# Altium PCB FM349ReaderV02.PcbDoc
Units mil, origin at the board's own origin, x right, y up, seen from the top; angles counter-clockwise.
Board outline 3875 x 3028 mil, 2 copper layers (Top Layer, Bottom Layer); 92 components, 80 nets, 380 pads, 77 vias.
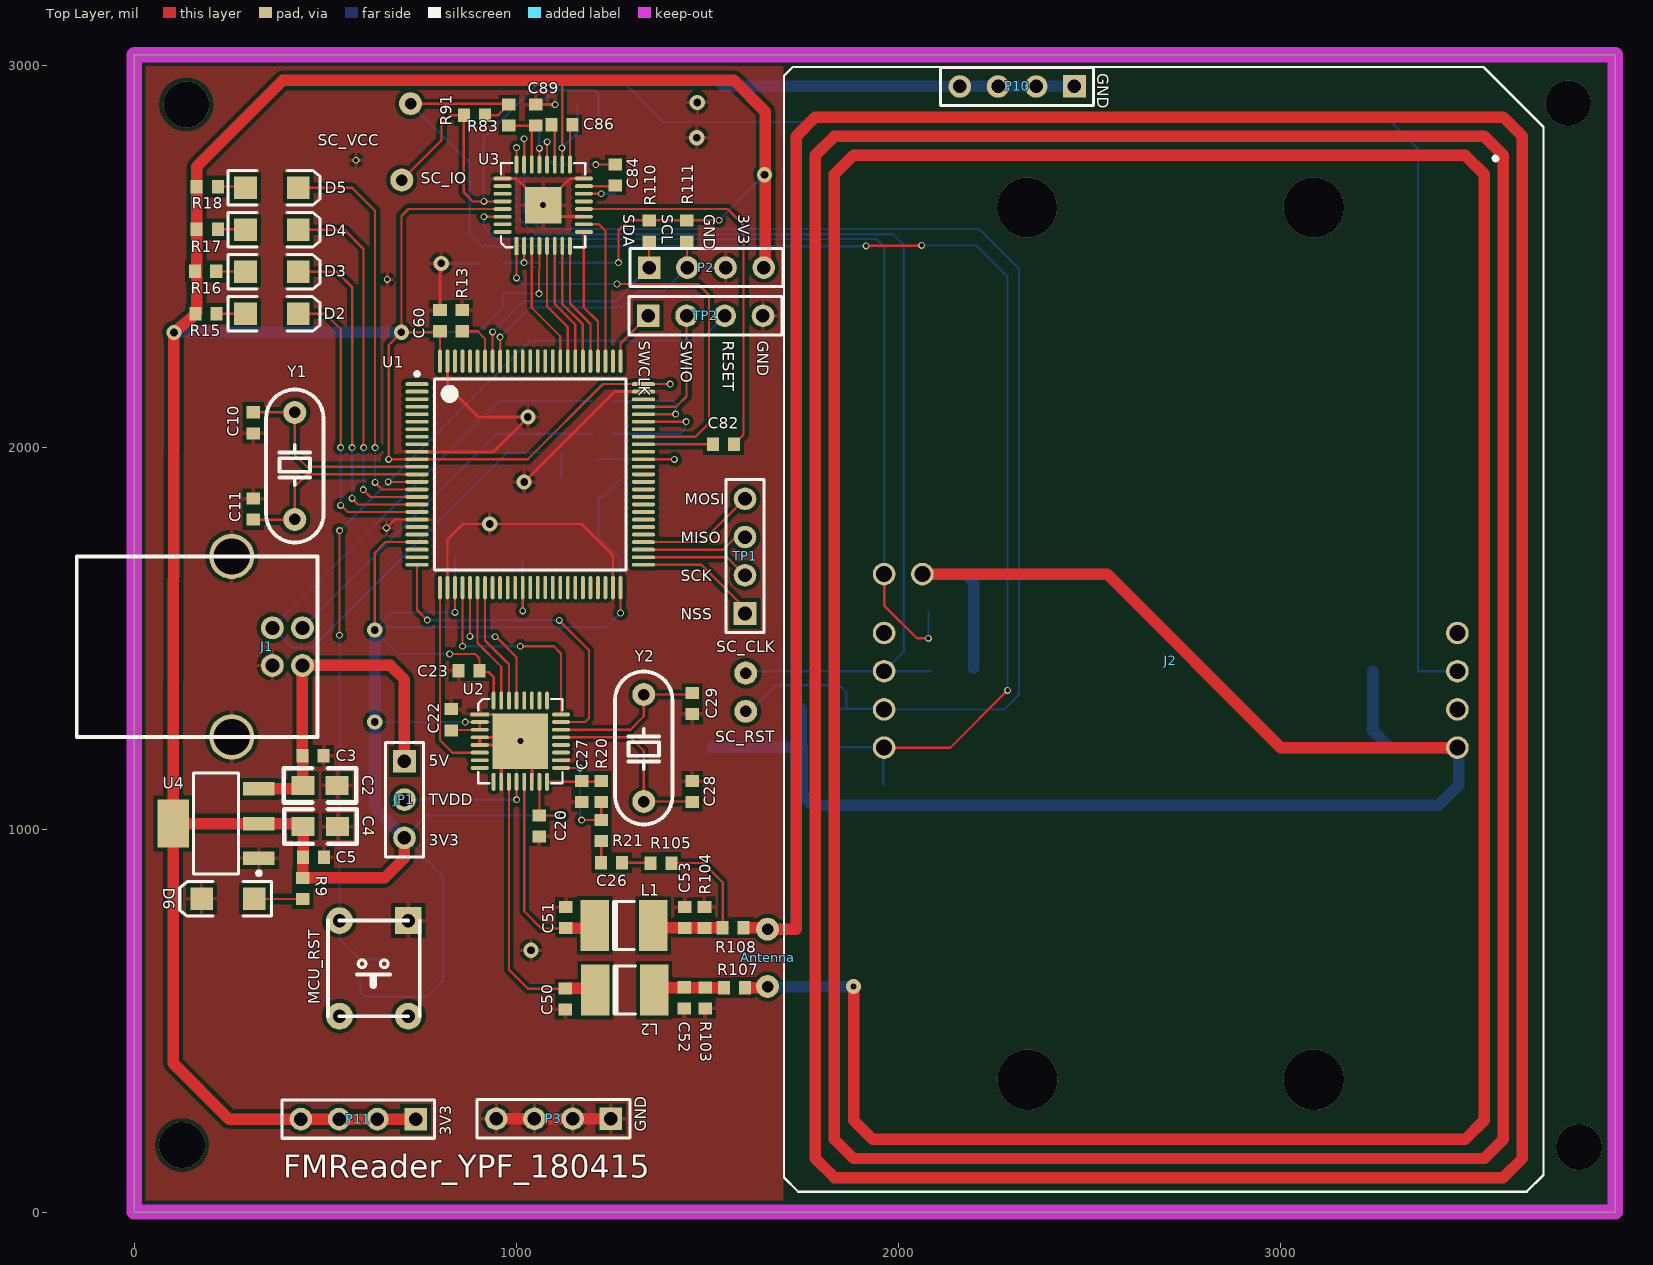
[diagram p0: Top Layer view]
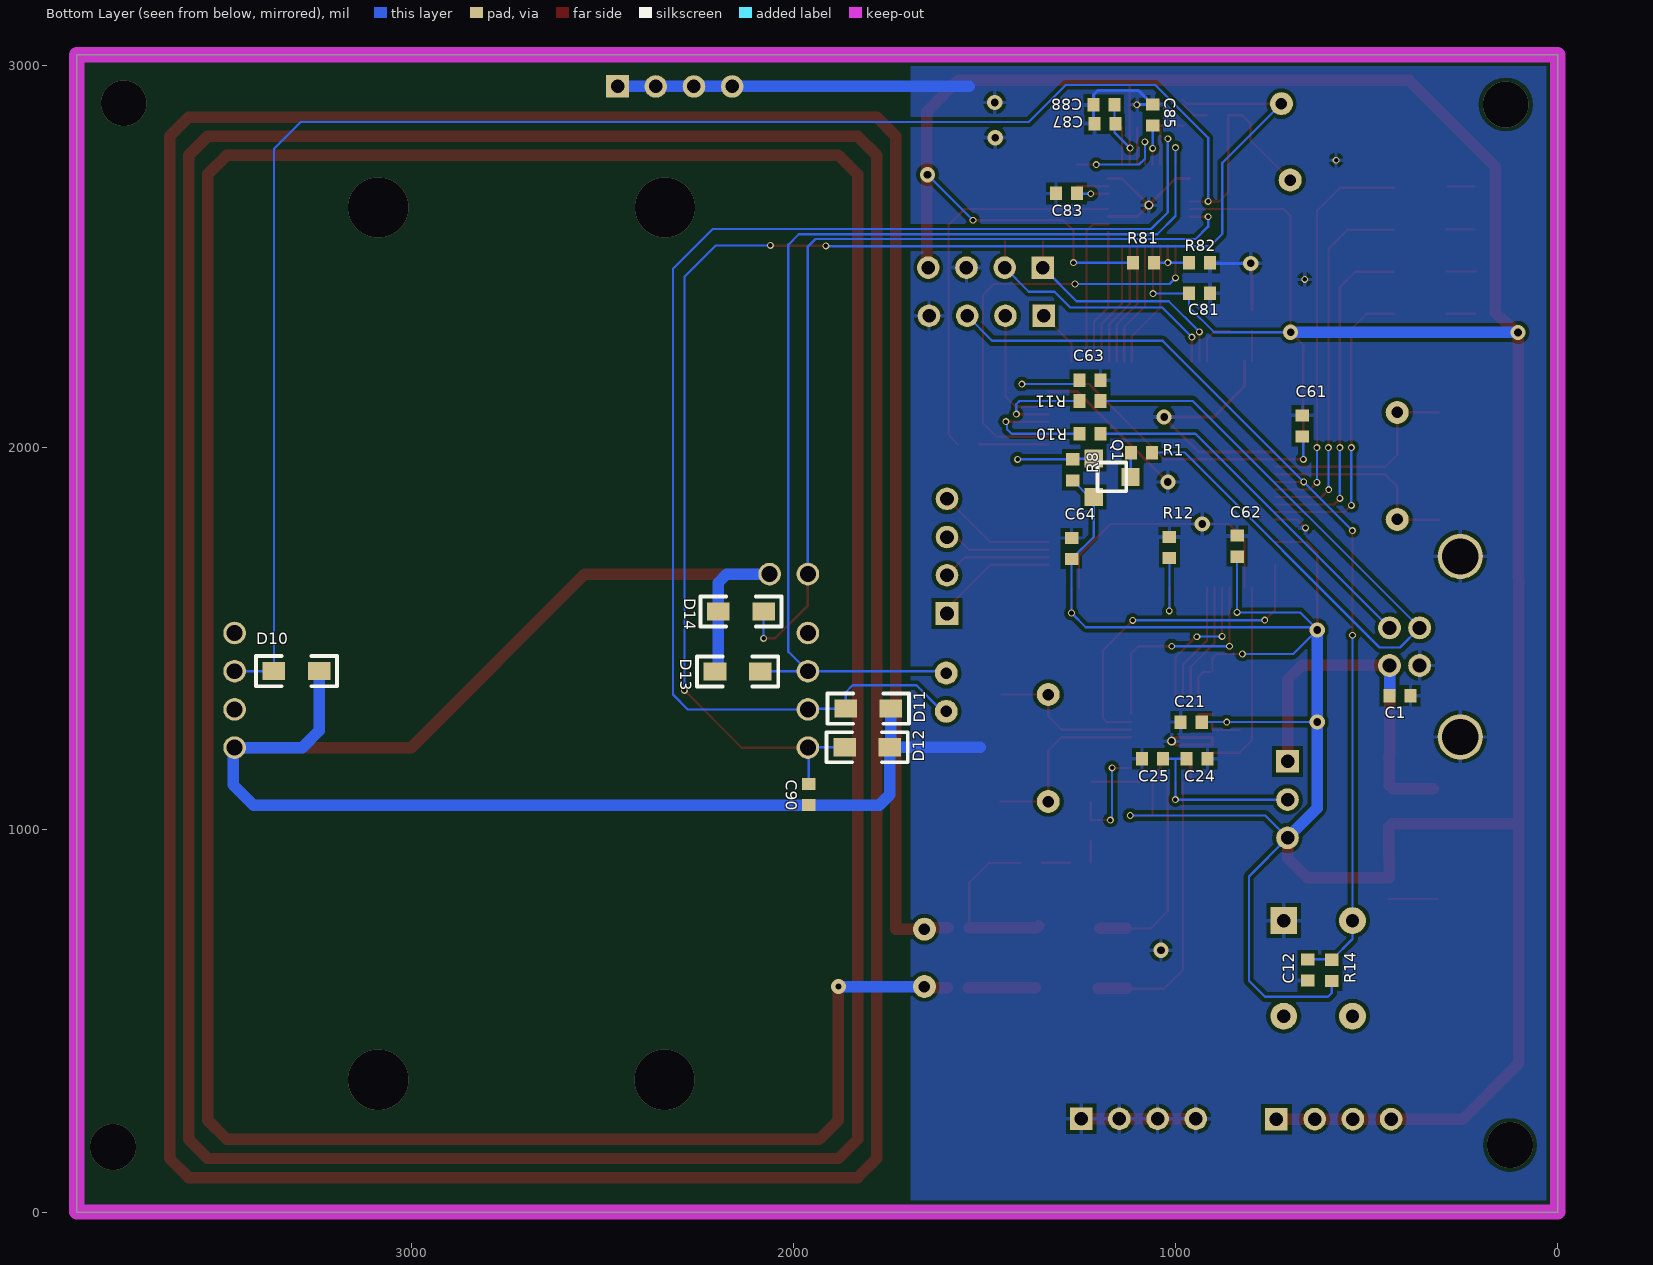
[diagram p1: Bottom Layer view, seen from below]

## Layer stack, top to bottom
Top Layer: signal copper 1.4
Dielectric: dielectric 12.6, FR-4, Dk 4.8
Bottom Layer: signal copper 1.4

## Board outline
0,0 0,3028 3875,3028 3875,0 0,0

## Design rules (kind name [scope] priority, off if disabled: settings)
Clearance Clearance_1 [All vs InPolygon] p1: gap=10
Clearance [All] p2: gap=6
ComponentClearance [All] p1 off: gap=10 collisioncheckmode=3 verticalgap=10 showdistances=FALSE
HoleSize [All] p1: absolutevalues=TRUE maxlimit=68501.97 minlimit=1 maxpercent=80.000 minpercent=20.000
MinimumSolderMaskSliver [All] p1 off: minsoldermaskwidth=10
PolygonConnect [All] p1: connectstyle=Relief reliefconductorwidth=10 reliefentries=4 polygonreliefangle="90 Angle"
RoutingVias [All] p1: holewidth=28 width=50 viastyle="Through Hole" minholewidth=20 minwidth=18 maxholewidth=150 maxwidth=150
SilkToSilkClearance [All] p1 off: silktosilkclearance=10
SilkscreenOverComponentPads [All] p1 off: minsilkscreentomaskgap=3
SolderMaskExpansion [All] p1: expansion=4
Width [All] p1: maxlimit=40 minlimit=6 preferedwidth=10
23 further rules are at their usual default settings.

## Components (designator, comment, footprint, x,y, rotation, side; value= is the part's Value field where it differs from the comment)
Antenna "ANT" ANTENNA 1882,2715 r270 top locked
C1 "10uF" 0603 413,1351 r0 bottom
C2 "10uF" 0805 441,1116.45 r0 top
C3 "0.1uF" 0603 468,1193.45 r180 top
C4 "10uF" 0805 442,1008.45 r0 top
C5 "0.1uF" 0603 469,928.45 r180 top
C10 "20pF" 0603 311,2065 r90 top
C11 "20pF" 0603 311,1839 r270 top
C12 "1uF" 0603 654,633.44 r90 bottom
C20 "10uF" 0603 1060,1010 r90 top
C21 "0.1uF" 0603 959,1282 r0 bottom
C22 "10uF" 0603 829,1288 r90 top
C23 "0.1uF" 0603 876,1416 r180 top
C24 "0.1uF" 0603 944,1186 r180 bottom
C25 "10uF" 0603 1060,1186 r0 bottom
C26 "0.1uF" 0603 1249,914 r180 top
C27 "0.1uF" 0603 1171,1100 r270 top
C28 "15pF" 0603 1460,1100 r270 top
C29 "15pF" 0603 1460,1330 r90 top
C50 "68pF" 0603 1127.33,557.56 r270 top
C51 "68pF" 0603 1129.33,770.56 r270 top
C52 "68pF" 0603 1439.33,560.56 r270 top
C53 "68pF" 0603 1440.33,770.56 r270 top
C60 "0.1uF" 0603 800,2332 r270 top
C61 "0.1uF" 0603 668,2057 r270 bottom
C62 "0.1uF" 0603 839,1742 r270 bottom
C63 "0.1uF" 0603 1224,2176 r0 bottom
C64 "0.1uF" 0603 1272,1736 r270 bottom
C81 "0.1uF" 0603 937,2404 r180 bottom
C82 "0.1uF" 0603 1542,2009 r0 top
C83 "0.1uF" 0603 1285,2665 r0 bottom
C84 "0.1uF" 0603 1259,2713 r270 top
C85 "0.1uF" 0603 1060,2870 r270 bottom
C86 "0.1uF" 0603 1119,2845 r0 top
C87 "0.1uF" 0603 1185,2847 r180 bottom
C88 "0.1uF" 0603 1187,2897 r180 bottom
C89 "0.1uF" 0603 1050,2870 r270 top
C90 "0.1uF" 0603 1960,1092 r270 bottom
D2 "LED2" 3.2X1.6X1.1 360,2350 r0 top
D3 "LED2" 3.2X1.6X1.1 360,2460 r0 top
D4 "LED2" 3.2X1.6X1.1 360,2570 r0 top
D5 "LED2" 3.2X1.6X1.1 360,2680 r0 top
D6 "LED2" 3.2X1.6X1.1 245,819.45 r180 top
D10 "ESD" SOD-323 3300,1415 r0 bottom
D11 "ESD" SOD-323 1804,1317 r0 bottom
D12 "ESD" SOD-323 1807,1216 r0 bottom
D13 "ESD" SOD-323 2146,1414 r180 bottom
D14 "ESD" SOD-323 2137,1571 r180 bottom
J1 "USB" USB-B 440,1430 r0 top
J2 "Card Slot" BIG-CARD-SLOT 1962,815 r90 top
JP1 "TVDD_SEL" HDR1X3 707,1179 r270 top
L1 "1uH" 1812 1281.33,749.56 r0 top
L2 "1uH" 1812 1283.33,580.56 r0 top
MCU_RST "BUTTON" BUTTON-S 717,512.44 r180 top
P2 "IIC_Port" HDR1X4 1347,2471 r0 top
P3 "CON4" HDR1X4 1247,244 r180 top
P10 "CON4" HDR1X4 2460,2945 r180 top
P11 "CON4" HDR1X4 736,243 r180 top
Q1 "SI2301" SOT-23-2301 1204,1961 r270 bottom
R1 "1.5K" 0603 1089,1987 r0 bottom
R8 "10K" 0603 1269,1942 r90 bottom
R9 "1.5K" 0603 441,846.45 r90 top
R10 "33" 0603 1224,2036 r0 bottom
R11 "33" 0603 1224,2122 r0 bottom
R12 "100K" 0603 1016,1739 r270 bottom
R13 "100K" 0603 858,2332 r270 top
R14 "10K" 0603 591,632.44 r90 bottom
R15 "330" 0603 188,2350 r180 top
R16 "330" 0603 187,2461 r0 top
R17 "330" 0603 191,2571 r180 top
R18 "330" 0603 191,2683 r180 top
R20 "820" 0603 1222,1100 r90 top
R21 "1K" 0603 1222,998 r90 top
R81 "1.5K" 0603 1084,2484 r0 bottom
R82 "1.5K" 0603 937,2484 r0 bottom
R83 "10K" 0603 980,2870 r90 top
R91 "1.5K" 0603 890,2870 r0 top
R103 "100K" 0603 1494,560 r90 top
R104 "100K" 0603 1492,771 r90 top
R105 "100K" 0603 1378,913 r180 top
R107 "100K" 0603 1570,587 r180 top
R108 "100K" 0603 1567,744 r180 top
R110 "1.5K" 0603 1347,2567 r270 top
R111 "1.5K" 0603 1446,2567 r270 top
TP1 "CON4" HDR1X4 1598,1566 r90 top
TP2 "CON4" HDR1X4 1345,2345 r0 top
U1 "STM32F103VBT6" LQFP100_L 1036,1930 r0 top locked
U2 "FM320" FM320_PIN32 1010,1232 r270 top locked
U3 "TDA8035" TDA8035_PIN32 1070,2634 r0 top locked
U4 "LM1117MP-3.3" MP04A_L 214,1016.45 r180 top
Y1 "8M" XTAL-0.2 420,1852 r90 top
Y2 "27.12M" XTAL-0.2 1333,1314 r270 top

## Footprints (in the part's own frame and the unit in brackets; to place one, negate y for a bottom-side part, rotate by r counter-clockwise, add the part's x,y. Pads: shape width x height; smd on the part's side, far side on the other; paste and mask are expansions set on the pad)
3.2X1.6X1.1 [mm] "SMT LED; 2 Flat Leads"
  rect 1.5x1.5 smd: 1(-1.75,0) 2(1.75,0)
  silkscreen extent -2.9,-1.15 3.2,1.15
0603 [mm] "Chip Capacitor, Body 1.6x0.8mm, IPC High Density"
  rect 0.8x0.9 smd: 1(-0.7,0) 2(0.7,0)
  body extent -0.87,-0.48 0.87,0.48, height 1.3
0805 [mil]
  rect 60x50 smd: 1(0,0) 2(90,0)
  silkscreen extent -50,-45 140,45
1812 [mm] "Chip Capacitor; Body 4.5 x 3.2 mm (LxW typ)"
  rect 1.9x3.4 smd: 1(-1.95,0) 2(1.95,0)
  silkscreen extent -0.7,-1.6 0.7,1.6
ANTENNA [mil]
  round 60 hole 30: 0(1975,-225) 1(2125,-225)
  Top Layer lines w30: 1975,-225 1975,-150 -100,-150 -150,-100 -150,1700 -100,1750 2575,1750 2625,1700 2625,-50 2575,-100 -50,-100 -100,-50 -100,1650 -50,1700 2525,1700 2575,1650 2575,0 2525,-50 0,-50 -50,0 -50,1600 0,1650 2475,1650 2525,1600 2525,50 2475,0 2125,0
  Bottom Layer lines w30: 2125,-225 2125,0
BIG-CARD-SLOT [mm]
  round 1.5 hole 1.05: 1(10.16,0) 2(12.7,0) 3(15.24,0) 4(17.78,0) 5(10.16,-38.1) 6(12.7,-38.1) 7(15.24,-38.1) 8(17.78,-38.1) 9(21.692,0) 10(21.692,-2.54)
  silkscreen extent 49.3,-40.64 49.33,-40.61
BUTTON-S [mil]
  rect 70x70 hole 35: 1(0,-250)
  round 70 hole 35: 2(180,-250) 3(0,0) 4(180,0)
  silkscreen extent -30,-250 210,0
FM320_PIN32 [mm]
  rect 0.254x1.2 smd: 1(-1.777,-2.694)
  oval 0.254x1.2 smd: 2(-1.269,-2.694) 3(-0.761,-2.694) 4(-0.253,-2.694) 5(0.255,-2.694) 6(0.763,-2.694) 7(1.271,-2.694) 8(1.779,-2.694) 17(1.779,2.706) 18(1.271,2.706) 19(0.763,2.706) 20(0.255,2.706) 21(-0.253,2.706) 22(-0.761,2.706) 23(-1.269,2.706) 24(-1.777,2.706)
  oval 1.2x0.254 smd: 9(2.701,-1.772) 10(2.701,-1.264) 11(2.701,-0.756) 12(2.701,-0.248) 13(2.701,0.26) 14(2.701,0.768) 15(2.701,1.276) 16(2.701,1.784) 25(-2.699,1.784) 26(-2.699,1.276) 27(-2.699,0.768) 28(-2.699,0.26) 29(-2.699,-0.248) 30(-2.699,-0.756) 31(-2.699,-1.264) 32(-2.699,-1.772)
  round 0.6 hole 0.4: 33(0.001,0.006)
  rect 3.683x3.683 smd: 33(0.001,0.006)
  silkscreen extent -2.8,-2.79 2.8,2.81
HDR1X3 [mm] "Connector; Header; 3 Position"
  rect 1.5x1.5 hole 0.9: 1(0,0)
  round 1.5 hole 0.9: 2(2.54,0) 3(5.08,0)
  silkscreen extent -1.27,-1.27 6.35,1.27
HDR1X4 [mm] "Connector; Header; 4 Position"
  rect 1.5x1.5 hole 0.9: 1(0,0)
  round 1.5 hole 0.9: 2(2.54,0) 3(5.08,0) 4(7.62,0)
  silkscreen extent -1.27,-1.27 8.89,1.27
LQFP100_L [mm] "Thin QFP, 100-Leads, Body 14x14mm, Pitch 0.5mm, IPC High Density"
  oval 1.55x0.25 smd: 1(-7.525,6) 2(-7.525,5.5) 3(-7.525,5) 4(-7.525,4.5) 5(-7.525,4) 6(-7.525,3.5) 7(-7.525,3) 8(-7.525,2.5) 9(-7.525,2) 10(-7.525,1.5) 11(-7.525,1) 12(-7.525,0.5) 13(-7.525,0) 14(-7.525,-0.5) 15(-7.525,-1) 16(-7.525,-1.5) 17(-7.525,-2) 18(-7.525,-2.5) 19(-7.525,-3) 20(-7.525,-3.5) 21(-7.525,-4) 22(-7.525,-4.5) 23(-7.525,-5) 24(-7.525,-5.5) 25(-7.525,-6) 51(7.525,-6) 52(7.525,-5.5) 53(7.525,-5) 54(7.525,-4.5) 55(7.525,-4) 56(7.525,-3.5) 57(7.525,-3) 58(7.525,-2.5) 59(7.525,-2) 60(7.525,-1.5) 61(7.525,-1) 62(7.525,-0.5) 63(7.525,0) 64(7.525,0.5) 65(7.525,1) 66(7.525,1.5) 67(7.525,2) 68(7.525,2.5) 69(7.525,3) 70(7.525,3.5) 71(7.525,4) 72(7.525,4.5) 73(7.525,5) 74(7.525,5.5) 75(7.525,6)
  oval 0.25x1.55 smd: 26(-6,-7.525) 27(-5.5,-7.525) 28(-5,-7.525) 29(-4.5,-7.525) 30(-4,-7.525) 31(-3.5,-7.525) 32(-3,-7.525) 33(-2.5,-7.525) 34(-2,-7.525) 35(-1.5,-7.525) 36(-1,-7.525) 37(-0.5,-7.525) 38(0,-7.525) 39(0.5,-7.525) 40(1,-7.525) 41(1.5,-7.525) 42(2,-7.525) 43(2.5,-7.525) 44(3,-7.525) 45(3.5,-7.525) 46(4,-7.525) 47(4.5,-7.525) 48(5,-7.525) 49(5.5,-7.525) 50(6,-7.525) 76(6,7.525) 77(5.5,7.525) 78(5,7.525) 79(4.5,7.525) 80(4,7.525) 81(3.5,7.525) 82(3,7.525) 83(2.5,7.525) 84(2,7.525) 85(1.5,7.525) 86(1,7.525) 87(0.5,7.525) 88(0,7.525) 89(-0.5,7.525) 90(-1,7.525) 91(-1.5,7.525) 92(-2,7.525) 93(-2.5,7.525) 94(-3,7.525) 95(-3.5,7.525) 96(-4,7.525) 97(-4.5,7.525) 98(-5,7.525) 99(-5.5,7.525) 100(-6,7.525)
  silkscreen extent -7.65,-6.35 6.35,6.8, body extent -7,-7 7,7, height 1.6
MP04A_L [mm] "SOT223, 4-Leads, Body 6.5x3.5mm, Pitch 2.3mm, Lead Span 7mm, IPC High Density"
  rect 2.1x0.9 smd: 1(-2.85,2.3) 2(-2.85,0) 3(-2.85,-2.3)
  rect 2.1x3.2 smd: 4(2.85,0)
  silkscreen extent -2.98,-3.35 1.5,3.42, body extent -1.85,-3.35 1.85,3.35, height 1.8
SOD-323 [mm]
  rect 1.5x1.2 smd: 1(-1.5,0) 2(1.5,0)
  silkscreen extent -2.7,-1 2.7,1
SOT-23-2301 [mm]
  rect 1.2x1.2 smd: 1(-0.254,-0.254) 2(2.286,-0.254) 3(0.95,2.2)
  silkscreen extent 0,0 1.91,1.91
TDA8035_PIN32 [mm]
  rect 0.254x1.2 smd: 1(-1.777,-2.694)
  oval 0.254x1.2 smd: 2(-1.269,-2.694) 3(-0.761,-2.694) 4(-0.253,-2.694) 5(0.255,-2.694) 6(0.763,-2.694) 7(1.271,-2.694) 8(1.779,-2.694) 17(1.779,2.706) 18(1.271,2.706) 19(0.763,2.706) 20(0.255,2.706) 21(-0.253,2.706) 22(-0.761,2.706) 23(-1.269,2.706) 24(-1.777,2.706)
  oval 1.2x0.254 smd: 9(2.701,-1.772) 10(2.701,-1.264) 11(2.701,-0.756) 12(2.701,-0.248) 13(2.701,0.26) 14(2.701,0.768) 15(2.701,1.276) 16(2.701,1.784) 25(-2.699,1.784) 26(-2.699,1.276) 27(-2.699,0.768) 28(-2.699,0.26) 29(-2.699,-0.248) 30(-2.699,-0.756) 31(-2.699,-1.264) 32(-2.699,-1.772)
  round 0.6 hole 0.4: 33(0.001,0.006)
  rect 2.4x2.4 smd: 33(0.001,0.006)
  silkscreen extent -2.8,-2.79 2.8,2.81
USB-B [mm]
  round 1.524 hole 0.92: 1(0,0) 2(0,2.5) 3(-2,2.5) 4(-2,0)
  round 3 hole 2.4: 5(-4.7,7.25) 6(-4.7,-4.75)
  silkscreen extent -15,-4.75 1,7.25
XTAL-0.2 [mil]
  round 60 hole 30: 1(-40,0) 2(240,0)
  silkscreen extent -100,-75 300,75

## Part data
C1 C3 C5 C10 C11 C12 C26 C27 C28 C29 C50 C51 C52 C53 C60 C61 C62 C63 C64 C81 C82 C83 C84 C85 C86 C87 C88 C89 C90: library part Cap, "Capacitor"
C2 C4: library part "Cap Pol1", "Polarized Capacitor (Radial)"
C20 C21 C22 C23 C24 C25: library part CAP, "Capacitor"
D2 D3 D4 D5 D6: "Typical RED, GREEN, YELLOW, AMBER GaAs LED"
D10 D11 D12 D13 D14: library part "D Zener", "Zener Diode"
JP1: library part "Header 3", "Header, 3-Pin"
L1 L2: library part Inductor, "Inductor"
MCU_RST: "乒乓球按键（压下后接通，松开自动断开），较大按键尺寸12mmX12mm选用BUTTON-"
P2: library part "Header 4", "Header, 4-Pin"
P3 P10 P11 TP1 TP2: "Connector"
Q1: library part PMOS-2, "P-Channel Power MOSFET"
R1 R8 R9 R10 R11 R12 R13 R14 R15 R16 R17 R18 R20 R21 R81 R82 R83 R91 R103 R104 R105 R107 R108 R110 R111: library part Res2, "Resistor"
U1: "STM32 ARM-based 32-bit MCU with 64 Kbytes Flash, 100-pin LQFP, Industrial Temperature"
U2: library part PN5120A0HN1
U4: "800mA Low-Dropout Linear Regulator"
Y1 Y2: library part XTAL, "Crystal Oscillator"

## Free pads (board coordinates)
  round 60 hole 30: 1(723,2900) 3(700,2700) 4(1600,1410) 5(1600,1310)

## Via types
v1: diameter 18, hole 12, Top Layer to Bottom Layer, 56 vias
v2: diameter 40, hole 20, Top Layer to Bottom Layer, 12 vias
v3: diameter 120, hole 120, Top Layer to Bottom Layer, 4 vias
v4: diameter 157.48, hole 157.48, Top Layer to Bottom Layer, 4 vias
v5: diameter 40, hole 15, Top Layer to Bottom Layer, 1 vias

## Nets (pads, with @x,y where several pads share a name; then routed paths per layer and width w, separated by ;. In a path a pad name is that pad's centre, name@x,y a point inside that pad or via, vN(x,y) a via of type N, cw(c..) or ccw(c..) an arc to the next point about the centre after c; other vN are vias at no path point)
+3.3: C4.1 C5.2 C20.2 C21.1 C22.1 C23.1 C60.2 C61.2 C62.2 C63.2 C64.2 C81.1 C87.2 C88.2 JP1.3 P2.4 P11.1 P11.2 P11.3 P11.4 Q1.2 R8.1 R9.2 R14.1 R15.2 R16.1 R17.2 R18.2 R81.2 R110.1 R111.1 U1.11 U1.22 U1.28 U1.50 U1.75 U1.100 U2.2 U2.3 U2.15 U2.32 U3.4 U3.18 U3.29 U4.2 U4.4 | length 14794.5
  Top Layer w6: v2(628.97,1522.97) 628.97,1724.97 656.83,1752.83 U1.22 ; v2@698.65,2302 v2(699,2302) ; C60.2@797.56,2302 v2(699,2302) ; U1.100 799.78,2304.22 C60.2 ; v1(825,1460) 892,1460 903.56,1448.44 C23.1 ; C22.1@832,1261.44 U2.3@903.39,1261.44 ; v1(839.15,1568.85) U1.28 ; v1(866.03,1281.97) U2.2 U2.3 ; C23.1@909.56,1413 927,1413 940.22,1399.78 U2.32 ; U3.29 717.22,2624.22 699,2606 v2(699,2302) ; v1(1059,2403) U3.4 ; C20.2 v1(1118.56,1037.56) ; C20.2@1060.22,1037.78 U2.15 ; U3.18 1120.03,2960.97 ; v1(1267,2484) 1267,2568 1293.56,2594.56 R110.1 R111.1 v1@1529.56,2594.56 ; v1(1272.22,1567.22) U1.50 ; v1(1402.22,2166.22) U1.75 1226.22,2166.22 1029.37,1969.37 U1.11 v1(665.63,1969.37) 665.63,2268.63 v2(699,2302)
  Top Layer w30: R15.2 v2(103.8,2301.35) U4.4 ; R15.2@163.44,2353 R17.2 R18.2 163.44,2735.44 389,2961 1120,2961 1569,2961 1651,2879 P2.4@1651,2471 ; C4.1@434,1016.45 U4.2 U4.4 ; R9.2 655.01,874.01 707,926 JP1.3 ; R9.2@441.44,874.45 C5.2 ; C5.2@442,929.01 C4.1 ; P11.1 P11.2 P11.3 P11.4 248,243 101.8,389.2 U4.4
  Bottom Layer w6: R14.1 591,573 601,563 766,563 808,605 808,878 JP1.3 765.56,1037.56 v1(1118.56,1037.56) ; v2(628.97,1281.97) v1(866.03,1281.97) C21.1 ; v2@628.97,1523.97 673.85,1568.85 v1(839.15,1568.85) 839,1569 C62.2 ; v1(665.63,1969.37) C61.2@665.63,2027.07 ; v2(699,2302) 899,2302 964.56,2367.56 C81.1 965.56,2403 v1(1059,2403) ; v1(825,1460) 691.94,1460 v2(628.97,1522.97) 636,1530 1235,1530 v1(1272.22,1567.22) C64.2@1272.22,1708.22 ; R81.2 v1(1267,2484) ; v1@1120.44,2783.38 1120.03,2782.97 v1(1119,2784) 1159.44,2824.44 C88.2 ; C63.2@1261.34,2166.22 v1(1402.22,2166.22) ; R8.1 1225.56,1871 Q1.2 1214,1766.44 C64.2 ; v1(1530,2595) v2(1649,2714)
  Bottom Layer w30: v2(103.8,2301.35) v2@700.65,2301.35 ; v2@628.97,1523.97 v2(628.97,1522.97) v2(628.97,1281.97) 628.97,1057.03 JP1.3
+5: C1.2 C2.1 C3.2 J1.1 JP1.1 U4.3 | length 993.9
  Top Layer w30: U4.3 C2.1@431.55,1107 ; C3.2@440,1193.89 J1.1 670,1430 707,1393 JP1.1 ; C2.1@440.44,1115.89 C3.2
  Bottom Layer w30: C1.2@440,1351.44 J1.1
CARDCLK: D13.2 J2.3 pad.4 U3.24 | length 2890.5
  Top Layer w6: U3.24 v1(1000.03,2784.97)
  Bottom Layer w6: v1(1000.03,2784.97) 1000.03,2605.97 1048,2558 1986,2558 2013,2531 2013,1466 J2.3 ; pad.4@1600,1415 J2.3 ; D13.2@2085.94,1415 J2.3
CARDIO: D10.2 J2.7 pad.3 R91.1 U3.28 | length 4779.2
  Top Layer w6: pad.3 804,2804 804,2848 826,2870 R91.1 862.44,2667.56 885.78,2644.22 v1(914.78,2644.22) U3.28
  Bottom Layer w6: v1(914.78,2644.22) 914.78,2810.78 1053,2949 1287,2949 1384.06,2851.94 3289.06,2851.94 3359.06,2781.94 D10.2 J2.7
CARDPRES: D14.2 J2.9 U3.30 | length 2304.3
  Top Layer w6: v1(914.78,2604.22) U3.30 ; J2.9 1962,1587 2047.94,1501.06 v1(2077.94,1501.06)
  Bottom Layer w6: v1(914.78,2604.22) 914.78,2578.22 947,2546 1942,2546 1962,2526 J2.9 ; v1(2077.94,1501.06) D14.2
CARDRST: D11.2 J2.2 pad.5 U3.23 | length 3578.4
  Top Layer w6: U3.23 v1(1020.03,2808)
  Bottom Layer w6: v1(1020.03,2808) 1020.03,2615.97 1064,2572 2211,2572 2315,2468 2315,1354 2276,1315 J2.2 ; pad.5@1585,1315 1615,1315 1678,1378 1845,1378 1863.06,1359.94 D11.2 ; D11.2@1843,1317 D11.2 ; J2.2@1967.94,1317 D11.2
CARDVCC: C90.1 D12.2 J2.1 pad.1 R83.2 R91.2 | length 3878.9
  Top Layer w6: pad.1 972,2900 R83.2@982,2910 ; R91.2 952.44,2870 R83.2 ; v1(1915,2528) v1@2059,2528 ; J2.1 2135,1215 v1(2285,1365)
  Bottom Layer w6: pad.1 878,2745 878,2559 910,2527 v1@1916,2527 ; D12.2@1850,1216 D12.2 J2.1@1971.94,1216 ; C90.1 J2.1@1960,1213 ; v1(2060,2529) 2203,2529 2285,2447 v1(2285,1365)
FM320_AUX1: U2.19
FM320_AUX2: U2.20
FM320_IRQ: U1.25 U2.23 | length 870.8
  Top Layer w6: U1.25 739.74,1575.26 v1(766.5,1548.5) ; v1(1112,1548) 1190,1470 1190,1292 1179.97,1281.97 U2.23
  Bottom Layer w6: v1(766.5,1548.5) v1@1115,1548.5
FM320_NRST: U1.26 U2.6 | length 517
  Top Layer w6: U1.26 799.78,1234.22 832.03,1201.97 U2.6
FM320_SIGIN: U2.7
FM320_SIGOUT: U2.8
FM320_SPI_MISO: U1.31 U2.31 | length 321.2
  Top Layer w6: U1.31 898.2,1488.8 960.22,1426.78 U2.31
FM320_SPI_MOSI: U1.32 U2.30 | length 321.3
  Top Layer w6: U1.32 917.89,1495.11 980.22,1432.78 U2.30
FM320_SPI_NSS: U1.29 U2.24 | length 578.7
  Top Layer w6: U1.29 v1(858.83,1480.17) v1@859,1480 ; v1(1010,1480.17) 1097.83,1480.17 1116.52,1461.48 U2.24
  Bottom Layer w6: v1(858.83,1480.17) v1(1010,1480.17)
FM320_SPI_SCK: U1.30 U2.29 | length 389.2
  Top Layer w6: v1@878.52,1505.52 U1.30 ; v1@944,1505.5 946.5,1505.5 1000.22,1451.78 U2.29
  Bottom Layer w6: v1(878,1506) v1@947,1506
  other v1: 944,1505
FM320_TVDD: C24.1 C25.1 JP1.2 U2.12 | length 506
  Top Layer w6: v1(1000.22,1079) U2.12
  Bottom Layer w6: JP1.2 v1(1000.22,1079) 1000.22,1184.22 ; C24.1 C25.1
GND: C1.1 C2.2 C3.1 C4.2 C5.1 C10.1 C11.1 C12.1 C20.1 C21.2 C22.2 C23.2 C24.2 C25.2 C27.2 C28.1 C29.1 C50.2 C51.1 C52.2 C53.1 C60.1 C61.1 C62.1 C63.1 C64.1 C81.2 C83.2 C85.1 C87.1 C88.1 C89.1 C90.2 D6.2 D10.1 D11.1 D12.1 D13.1 D14.1 J1.4 J1.5 J1.6 J2.5 J2.10 MCU_RST.1 P2.3 P3.1 P3.2 P3.3 P3.4 P10.1 P10.2 P10.3 P10.4 R12.1 R13.1 R82.1 R103.1 R104.2 TP2.4 U1.10 U1.19 U1.27 U1.49 U1.74 U1.99 U2.1 U2.4 U2.5 U2.10 U2.14 U2.18 U2.33 U3.11 U3.16 U3.25 U3.33 U4.1 | length 9074.5
  Top Layer w6: v1(660,1790) 681.89,1811.89 U1.19 ; U1.27 819.46,1759.46 860,1800 v2(930,1800) 1170,1800 1252.54,1717.46 U1.49
  Top Layer w8: U1.10 940,1989.06 1030,2079.06 v2(1030,2080) 900,2080 819.46,2160.54 U1.99 ; C60.1 v2@800,2479 ; U2.1 U2.33@940.22,1301.97 ; U2.10 U2.33@960.22,1181.97 ; U3.25 1000.03,2704.22 U3.33@1070.03,2634.22 ; U2.33@1000.22,1221.97 U2.5 U2.4 U2.33@1000.22,1241.97 ; v2(1020,1910) 1256.54,2146.54 U1.74 ; C89.1@1040,2900 C89.1@1050,2910 ; U2.14 U2.33@1040.22,1201.97 ; C89.1 1088.56,2897.56 1088,2897 v1(1101,2897) ; U3.11 1100.03,2604.22 U3.33@1070.03,2634.22 ; U3.16 1140.03,2704.22 U3.33@1070.03,2634.22
  Top Layer w30: P3.4 P3.3 P3.2 P3.1 ; J2.10 2545.98,1669.02 3000,1215 J2.5
  Bottom Layer w8: v2(803,2482) R82.1@907.44,2482 ; C85.1@1050,2910 1060,2900 C85.1 ; v1@1100.44,2897.56 C85.1 ; C87.1 1214.56,2849 C88.1 1214.56,2923.44 1204,2934 1096.44,2934 C85.1
  Bottom Layer w30: 1511,1216 D12.1 1747.94,1092.06 1775.56,1064.44 C90.2 3412.44,1064.44 3465.44,1117.44 J2.5@3465.44,1211.56 ; 1540,2945 P10.4 P10.3 P10.2 P10.1 ; D12.1@1744.94,1219 D11.1 ; J2.10 2173.98,1669.02 2196.06,1646.94 D14.1 D13.1@2196.06,1423 ; D10.1 3240.94,1259.06 3285,1215 J2.5
  other v1: 662,2440 580,2752
  other v2: 1038,685 1472,2811 1473,2903
IIC_SCL: P2.2 R111.2 U1.92 | length 695.3
  Top Layer w6: U1.92 v1(957.26,2289) ; P2.2@1446,2472 R111.2
  Bottom Layer w6: v1(957.26,2289) 1035,2366.74 1275.74,2366.74 1317,2408 1384,2408 P2.2
IIC_SDA: P2.1 R110.2 U1.93 | length 626.2
  Top Layer w6: U1.93 v1(937.57,2303) v1@937.57,2305 ; P2.1 R110.2
  Bottom Layer w6: v1(937.57,2303) 1017.57,2383 1259,2383 P2.1
LED1: D2.2 U1.18 | length 795
  Top Layer w6: D2.2 500,2350 540,2310 v1(540,2000) ; v1@540,1850 558.43,1831.57 U1.18
  Bottom Layer w6: v1@540,1850 v1(540,2000)
  other v1: 540,1849
LED2: D3.2 U1.17 | length 886.9
  Top Layer w6: D3.2 530,2460 570,2420 v1(570,2000) ; v1(570,1867) 585.74,1851.26 U1.17
  Bottom Layer w6: v1(570,1867) v1(570,2000)
LED3: D4.2 U1.16 | length 969.4
  Top Layer w6: D4.2 550,2570 600,2520 v1(600,2000) ; v1(599,1890) 618.06,1870.94 U1.16
  Bottom Layer w6: v1@600,1891 v1(600,2000)
LED4: D5.2 U1.15 | length 1054.3
  Top Layer w6: D5.2 570,2680 630,2620 v1(630,2000) ; v1(630,1909) 648.37,1890.63 U1.15
  Bottom Layer w6: v1(630,1909) v1(630,2000)
NetAntenna_0: Antenna.0 Antenna.1 R107.1 R108.1 | length 114.9
  Top Layer w30: R108.1 Antenna.0@1653,744 ; R107.1 Antenna.1@1654,587
  other v5: 1882,590
NetC10_2: C10.2 U1.12 Y1.2 | length 552.2
  Top Layer w6: C10.2 Y1.2@419.44,2092.56 ; Y1.2 420,1981 451.31,1949.69 U1.12
NetC11_2: C11.2 U1.13 Y1.1 | length 528.2
  Top Layer w6: C11.2 419.44,1811.44 Y1.1 420,1898 452,1930 U1.13
NetC26_2: C26.2 R21.1 | length 55.9
  Top Layer w6: C26.2@1222,914.56 R21.1
NetC28_2: C28.2 U2.21 Y2.2 | length 489.4
  Top Layer w6: U2.21 1298.03,1241.97 1333,1207 Y2.2 C28.2@1458.44,1074
NetC29_2: C29.2 U2.22 Y2.1 | length 411.5
  Top Layer w6: U2.22 1298.03,1261.97 1333,1296.94 Y2.1 C29.2@1456.44,1354
NetC52_1: C52.1 L2.2 R103.2 R107.2 | length 175.9
  Top Layer w30: L2.2@1366.54,587 R107.2
NetC53_2: C53.2 L1.2 R104.1 R105.1 R108.2 | length 457
  Top Layer w6: R105.1 1489,913 1539.44,862.56 R108.2
  Top Layer w30: L1.2 1363.66,744 R108.2
NetC82_2: C82.2 U3.12 | length 1018.5
  Top Layer w6: U3.12 1552.22,2624.22 1594,2582.44 1594,2033.44 C82.2
NetC83_1: C83.1 U3.14 | length 81.4
  Top Layer w6: U3.14 v1(1221.78,2664.22)
  Bottom Layer w6: v1@1222.56,2665 v1(1221.78,2664.22) C83.1@1256.66,2664.22
NetC84_1: C84.1 U3.20 | length 288.9
  Top Layer w6: U3.20 v1(1080.03,2800) ; v1(1207.44,2740.56) C84.1
  Bottom Layer w6: v1(1080.03,2800) 1080.03,2755.97 1095.44,2740.56 v1(1207.44,2740.56)
NetC84_2: C84.2 U3.15 | length 81.4
  Top Layer w6: U3.15 C84.2@1257.78,2684.22
NetC85_2: C85.2 U3.21 | length 99.5
  Top Layer w6: U3.21 v1(1060,2783)
  Bottom Layer w6: v1(1060,2783) C85.2@1060,2840
NetC86_1: C86.1 U3.19 | length 96.5
  Top Layer w6: C86.1@1100.03,2836.41 U3.19 U3.19@1100.44,2740.93
NetC86_2: C86.2 U3.17 | length 98
  Top Layer w6: U3.17 C86.2@1140.03,2838.47
NetC89_2: C89.2 R83.1 U3.22 | length 162
  Top Layer w6: R83.1 C89.2 ; U3.22 C89.2@1040.03,2832.47
NetD2_1: D2.1 R15.1 | length 75.5
  Top Layer w6: R15.1 D2.1
NetD3_1: D3.1 R16.2 | length 75.5
  Top Layer w6: R16.2 D3.1@290.1,2461
NetD4_1: D4.1 R17.1 | length 71.5
  Top Layer w6: R17.1 D4.1@290.1,2571
NetD5_1: D5.1 R18.1 | length 69.5
  Top Layer w6: R18.1 D5.1@288.1,2683
NetD6_1: D6.1 R9.1 | length 126.5
  Top Layer w6: D6.1@314.46,818.89 R9.1
NetQ1_2: Q1.3 R1.2 | length 61.2
  Bottom Layer w6: Q1.3@1117.56,1923.77 R1.2@1117.56,1985
NetR10_2: R10.2 U1.70 | length 322.7
  Top Layer w6: U1.70 v1@1440.8,2067.8
  Bottom Layer w6: R10.2 1429,2036 1440.8,2047.8 v1@1440.8,2067.8
  other v1: 1444,2068
NetR11_2: R11.2 U1.71 | length 278.7
  Top Layer w6: U1.71 v1(1416.48,2087.48)
  Bottom Layer w6: R11.2 1408,2122 1416.48,2113.52 v1(1416.48,2087.48)
NetR12_2: R12.2 U1.37 | length 199.5
  Top Layer w6: v1(1016.32,1572.68) U1.37
  Bottom Layer w6: v1@1016,1573 R12.2
NetR13_2: R13.2 U1.94 | length 126.7
  Top Layer w6: R13.2 898.56,2304.44 917.89,2285.11 U1.94
NetR20_1: R20.1 R21.2 U2.17 | length 286.2
  Top Layer w6: U2.17 v1(1166,1162) ; v1(1170.44,1025.56) R21.2 R20.1
  Bottom Layer w6: v1(1166,1162) 1166,1030 v1(1170.44,1025.56)
NetR81_1: R81.1 R82.2 U3.2 | length 137.2
  Top Layer w6: v1(1020.03,2484.03) U3.2
  Bottom Layer w6: R82.2 R81.1 ; R81.1@1046.44,2473 R81.1@1047.44,2472
PE12: U1.43
PE13: U1.44
PE14: U1.45
PE15: U1.46
RESET: C12.2 MCU_RST.2 R14.2 TP2.3 U1.14 | length 2523.9
  Top Layer w6: v1(537,1509) v1@537,1782.63 ; v1(664.68,1910.32) U1.14
  Bottom Layer w6: v1(537,1509) MCU_RST.2 537,714 R14.2 592,661 C12.2 ; v1(537.37,1783) v1(664.68,1910.32) 1033.68,2279.32 1479.32,2279.32 TP2.3
RX: C26.1 R105.2 | length 72.9
  Top Layer w6: C26.1 R105.2@1349.44,914
SPI2_MISO: TP1.3 U1.53 | length 279.3
  Top Layer w6: U1.53 1541.15,1733.15 1574,1766 TP1.3
SPI2_MOSI: TP1.4 U1.54 | length 312.6
  Top Layer w6: U1.54 1484.83,1752.83 TP1.4
SPI2_NSS: TP1.1 U1.51 | length 326.9
  Top Layer w6: U1.51 1484.22,1693.78 1598,1580 TP1.1
SPI2_SCK: TP1.2 U1.52 | length 285.4
  Top Layer w6: U1.52 1550.54,1713.46 TP1.2
SWCLK: TP2.1 U1.76 | length 148.9
  Top Layer w6: U1.76 1272.22,2272.22 TP2.1
SWDIO: TP2.2 U1.72 | length 334.9
  Top Layer w6: U1.72 1418.17,2107.17 1445,2134 TP2.2
TDA_1.8VN: U1.80 U3.8 | length 323.8
  Top Layer w6: U3.8 1140.03,2376.97 1193.48,2323.52 U1.80
TDA_5V_3VN: U1.81 U3.7 | length 323.9
  Top Layer w6: U3.7 1120.03,2375.97 1173.8,2322.2 U1.81
TDA_CLK: C82.1 U1.67 | length 181.9
  Top Layer w6: U1.67 C82.1@1514.18,2008.74
TDA_CLKDIV1: U1.83 U3.5 | length 324.2
  Top Layer w6: U3.5 1080.03,2369.97 1134.43,2315.57 U1.83
TDA_CLKDIV2: U1.82 U3.6 | length 324.1
  Top Layer w6: U3.6 1100.03,2375.97 1154.11,2321.89 U1.82
TDA_CMDVCCN: U1.84 U3.3 | length 332.6
  Top Layer w6: U3.3 1040.03,2365.97 1114.74,2291.26 U1.84
TDA_IOUC: U1.68 U3.1 | length 1128
  Top Layer w6: v1(1000,2444) U3.1 ; v1(1263,2428) 1475,2428 1504,2399 1504,2064 1468.43,2028.43 U1.68
  Bottom Layer w6: v1(1000,2444) 1016,2428 v1(1263,2428)
TDA_OFFN: U1.78 U3.10 | length 404.5
  Top Layer w6: U3.10 1215.78,2584.22 1232.85,2567.15 U1.78
TDA_RSTN: U1.79 U3.9 | length 353.2
  Top Layer w6: U3.9 1176.33,2366.67 1213.17,2329.83 U1.79
TX1: C50.1 L2.1 U2.11 | length 734.7
  Top Layer w6: U2.11 980.22,633.78 1029.88,584.12 1126.33,584.12 C50.1
  Top Layer w30: C50.1 L2.1@1202,585.12
TX2: C51.2 L1.1 U2.13 | length 534.2
  Top Layer w6: U2.13 1020.22,786.78 1065,742 C51.2@1128.33,742
  Top Layer w30: C51.2 L1.1@1198,743
USB_EN: Q1.1 R8.2 U1.65 | length 278.9
  Top Layer w6: U1.65 v1(1413.37,1969.37)
  Bottom Layer w6: Q1.1 R8.2@1267.56,1971 ; R8.2 v1@1413.18,1969.56
USBD+: J1.3 R1.1 R11.1 | length 2013.8
  Bottom Layer w6: R1.1 976,1987 466,1477 412.68,1477 J1.3 954.83,2122 R11.1
USBD-: J1.2 R10.1 | length 966.7
  Bottom Layer w6: J1.2 947.58,2036 R10.1
VMID: C27.1 R20.2 U2.16 | length 139.9
  Top Layer w6: U2.16 R20.2@1220.11,1125.67
pads on no net: J2.4 J2.6 J2.8 MCU_RST.3 MCU_RST.4 U1.1 U1.2 U1.3 U1.4 U1.5 U1.6 U1.7 U1.8 U1.9 U1.20 U1.21 U1.23 U1.24 U1.33 U1.34 U1.35 U1.36 U1.38 U1.39 U1.40 U1.41 U1.42 U1.47 U1.48 U1.55 U1.56 U1.57 U1.58 U1.59 U1.60 U1.61 U1.62 U1.63 U1.64 U1.66 U1.69 U1.73 U1.77 U1.85 U1.86 U1.87 U1.88 U1.89 U1.90 U1.91 U1.95 U1.96 U1.97 U1.98 U2.9 U2.25 U2.26 U2.27 U2.28 U3.13 U3.26 U3.27 U3.31 U3.32
copper on no net:
  other v3: 3780,170 125,175 136,2898 3752,2901
  other v4: 2337,346 3086,346 2336,2628 3086,2628

## Polygon pours and split planes (outlines as drawn)
GND on Top Layer "BottomGnd" (solid, remove dead copper, pour order 4): 5,10 18,-3 1698,-3 1698,3026 1700,3028 1695,3023 0,3023 0,15 9,6
GND on Bottom Layer "BottomGnd" (solid, remove dead copper, pour order 6): 0,0 3,-3 1693,-3 1693,3023 1695,3025 1692,3028 8,3028 8,8 0,0

## Keep-outs
Keep-Out Layer:
  the board outline again, w40

## Silkscreen, mask and mechanical layers (free items; w line width, h text height)
Top Overlay:
  lines w6: 1700,90 1700,2973 1723,2996 3530,2996 3687,2839 3687,97 3643,53 1737,53 1700,90
  text "GND" at 2520,2980 h30 r270
  text "SC_VCC" at 480,2790 h30
  text "SC_IO" at 750,2690 h30
  text "SDA" at 1280,2610 h30 r270
  text "SCL" at 1380,2610 h30 r270
  text "GND" at 1490,2610 h30 r270
  text "3V3" at 1580,2610 h30 r270
  text "SWCLK" at 1320,2280 h30 r270
  text "SWIO" at 1430,2280 h30 r270
  text "RESET" at 1540,2280 h30 r270
  text "GND" at 1630,2280 h30 r270
  text "MOSI" at 1440,1850 h30
  text "MISO" at 1430,1750 h30
  text "SCK" at 1430,1650 h30
  text "NSS" at 1430,1550 h30
  text "SC_CLK" at 1523,1465 h30
  text "SC_RST" at 1520,1229 h30
  text "5V" at 771,1166 h30
  text "TVDD" at 771,1064 h30
  text "3V3" at 770,958 h30
  text "GND" at 1340,210 h30 r90
  text "3V3" at 830,200 h30 r90
  text "FMReader_YPF_180415" at 390,90 h60